# EAGLE board carryskip-tinkercad-v1 (EAGLE 9.7.0)

Size 208.13 x 445.31 mm. Coordinates in mm from the lower left corner, seen from the top.
Outline: 0,0 208.13,0 208.13,445.31 0,445.31 0,0
Copper layers (1*16): Top 0.035mm / dielectric 1.5mm / Bottom 0.035mm
Design rules "default": minimum track width 6mil, minimum drill 0.35mm, track to track 6mil, track to pad 6mil, pad to pad 6mil, via to via 6mil, smd to smd 6mil, copper to edge 40mil, drill to drill 6mil, minimum pad ring 10mil, minimum via ring 8mil, stop-mask expansion 4mil, vias tented up to drill 0mil, thermal gap 10mil

## Footprints (pad centres in the part's own frame; a part is rotated, then mirrored left to right if it is on the bottom)
LEDRD254W60D565H860B_W = drill 0.981 pad 1.581: 1 -1.27,0; 2 1.27,0
LEDRD254W60D565H860B = drill 0.981 pad 1.581: 1 -1.27,0; 2 1.27,0
BATTERY-GENERIC = drill 1.118 pad 3.15 octagon: + 2.54,0; - -2.54,0
RESAD1016W63L850D250B = drill 0.83 pad 1.43: 1 -5.08,0; 2 5.08,0
78B04ST = drill 0.8: 1 -3.81,-3.81; 2 -1.27,-3.81; 3 1.27,-3.81; 4 3.81,-3.81; 5 3.81,3.81; 6 1.27,3.81; 7 -1.27,3.81; 8 -3.81,3.81
DIP762W53P254L1969H508Q14B = drill 0.743 pad 1.343: 1 -3.81,7.62; 2 -3.81,5.08; 3 -3.81,2.54; 4 -3.81,0; 5 -3.81,-2.54; 6 -3.81,-5.08; 7 -3.81,-7.62; 8 3.81,-7.62; 9 3.81,-5.08; 10 3.81,-2.54; 11 3.81,0; 12 3.81,2.54; 13 3.81,5.08; 14 3.81,7.62

## Placement (x,y rotation side)
D1  WHITE  [LEDRD254W60D565H860B_W]  66.49,437.06 180 top
D2  WHITE  [LEDRD254W60D565H860B_W]  71.58,437.1 180 top
D3  WHITE  [LEDRD254W60D565H860B_W]  76.22,437.09 180 top
D4  WHITE  [LEDRD254W60D565H860B_W]  81.58,437.24 180 top
D5  RED  [LEDRD254W60D565H860B]  125.01,437.41 180 top
P1  BATTERYGENERIC  [BATTERY-GENERIC]  8.26,37.19 180 top
R1  1k  [RESAD1016W63L850D250B]  66.46,8.97 90 top
R2  1k  [RESAD1016W63L850D250B]  69,8.97 90 top
R3  1k  [RESAD1016W63L850D250B]  71.54,8.97 90 top
R4  1k  [RESAD1016W63L850D250B]  74.08,8.97 90 top
R5  1k  [RESAD1016W63L850D250B]  84.24,8.97 90 top
R6  1k  [RESAD1016W63L850D250B]  86.78,8.97 90 top
R7  1k  [RESAD1016W63L850D250B]  89.32,8.97 90 top
R8  1k  [RESAD1016W63L850D250B]  91.86,8.97 90 top
R9  1k  [RESAD1016W63L850D250B]  65.32,406.32 90 top
R10  1k  [RESAD1016W63L850D250B]  70.41,406.72 90 top
R11  1k  [RESAD1016W63L850D250B]  75.48,406.32 90 top
R12  1k  [RESAD1016W63L850D250B]  80.56,406.32 90 top
R13  1k  [RESAD1016W63L850D250B]  123.74,406.32 90 top
SW1  SPST-478B04ST  [78B04ST]  70.27,43.26 0 top
SW2  SPST-478B04ST  [78B04ST]  88.05,43.26 0 top
U1  74HC08_PDIP  [DIP762W53P254L1969H508Q14B]  155.11,142.03 90 top
U2  74HC86_PDIP  [DIP762W53P254L1969H508Q14B]  117.01,142.03 90 top
U3  74HC32_PDIP  [DIP762W53P254L1969H508Q14B]  193.21,142.03 90 top

## Library data of the parts
D1-D4 = Tinkercad; CATEGORY: Opto-Electronic; SUB-CATEGORY: LED; VALUE: LED_WHITE
D5 = Tinkercad; CATEGORY: Opto-Electronic; SUB-CATEGORY: LED; VALUE: LED_RED
P1 R1-R13 SW1 SW2 U1-U3 = Tinkercad

## Nets
D1_C: D1.2 R9.2
D2_C: D2.2 R10.2
D3_C: D3.2 R11.2
D4_C: D4.2 R12.2
D5_C: D5.2 R13.2
P1+: P1.+ SW1.5 SW1.6 SW1.7 SW1.8 SW2.5 SW2.6 SW2.7 SW2.8 U1.14 U2.14 U3.14
P1-: P1.- R1.1 R2.1 R3.1 R4.1 R5.1 R6.1 R7.1 R8.1 R9.1 R11.1 R12.1 R13.1 U1.4 U1.7 U2.4 U2.7 U3.7
SW1_2: R2.2 SW1.2
SW1_3: R3.2 SW1.3
SW1_4: R4.2 SW1.4
SW2_2: R6.2 SW2.2
SW2_3: R7.2 SW2.3
SW2_4: R8.2 SW2.4
U1_2Y: U1.6 U3.2
U2_1A: R1.2 SW1.1 U1.1 U2.1 U3.1
U2_1B: R5.2 SW2.1 U1.2 U2.2
U2_1Y: U1.5 U2.3 U2.5
U2_2Y: D1.1 U2.6
U3_1Y: D5.1 U3.3

## Tracks (layer width: path | path; a pad name or v marks a point on that pad's centre or on a via)
D1_C  (1 unrouted)
D2_C  (1 unrouted)
D3_C  (1 unrouted)
D4_C  (1 unrouted)
D5_C  (1 unrouted)
P1+  (11 unrouted)
P1-  (17 unrouted)
SW1_2  (1 unrouted)
SW1_3  (1 unrouted)
SW1_4  (1 unrouted)
SW2_2  (1 unrouted)
SW2_3  (1 unrouted)
SW2_4  (1 unrouted)
U1_2Y  (1 unrouted)
U2_1A  (4 unrouted)
U2_1B  (3 unrouted)
U2_1Y  (2 unrouted)
U2_2Y  (1 unrouted)
U3_1Y  (1 unrouted)